# Allegro board DIAPAZON880.brd
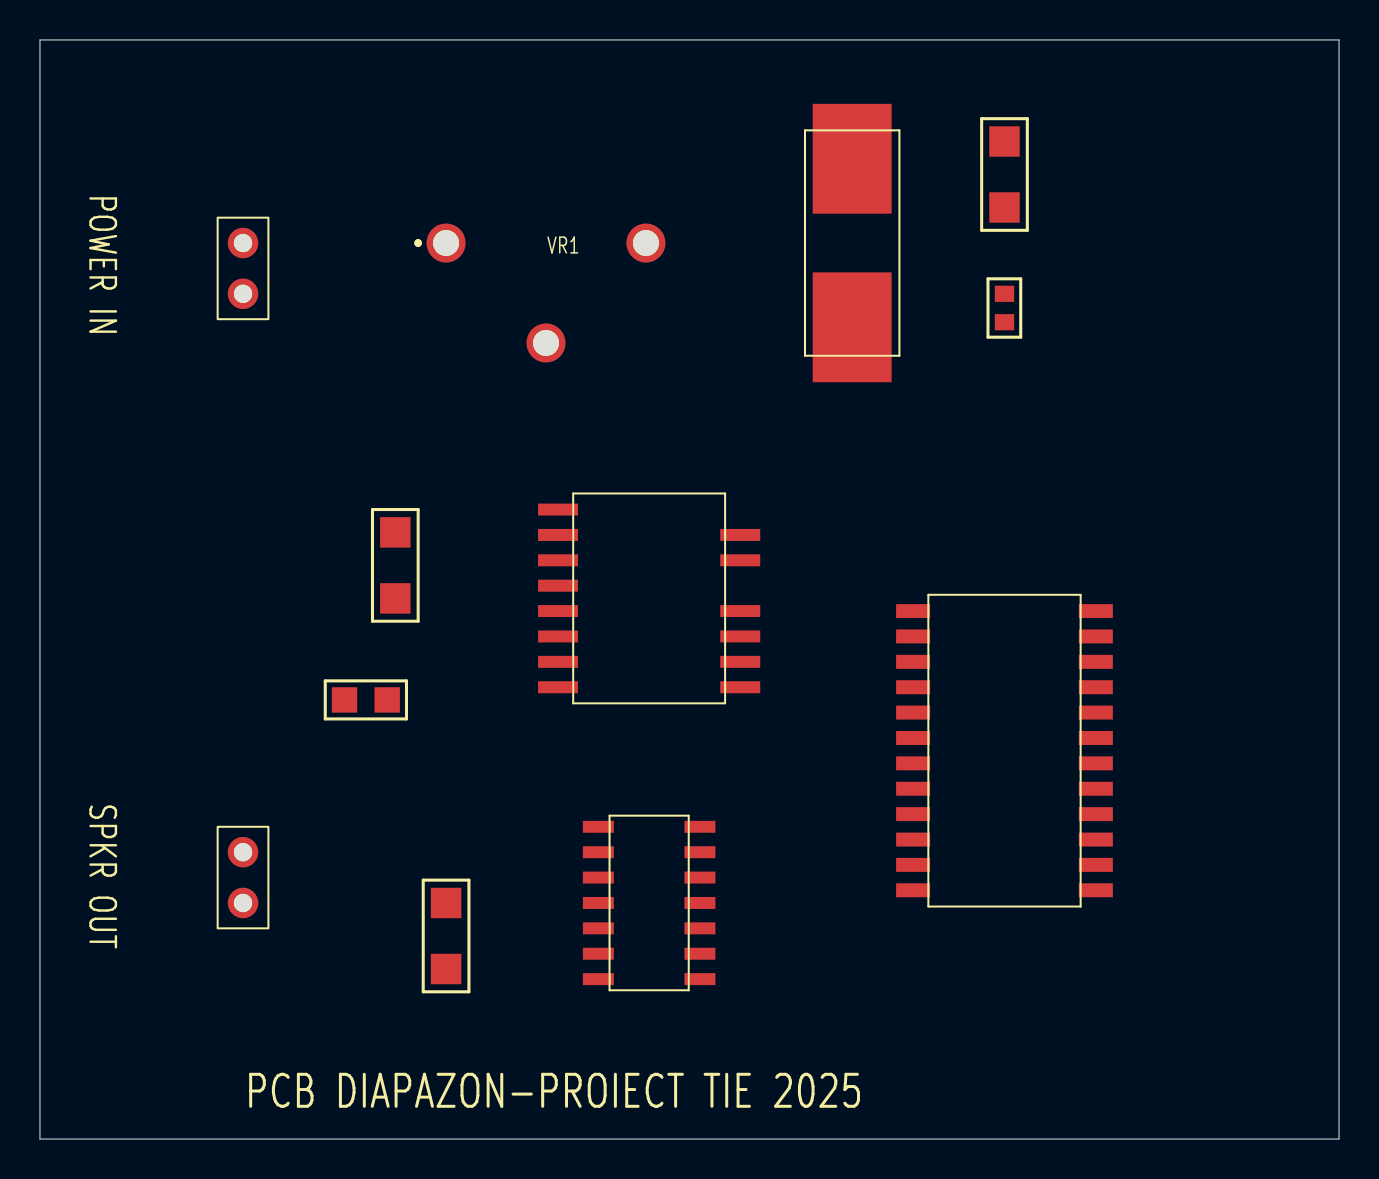
[diagram p0: board, top side]
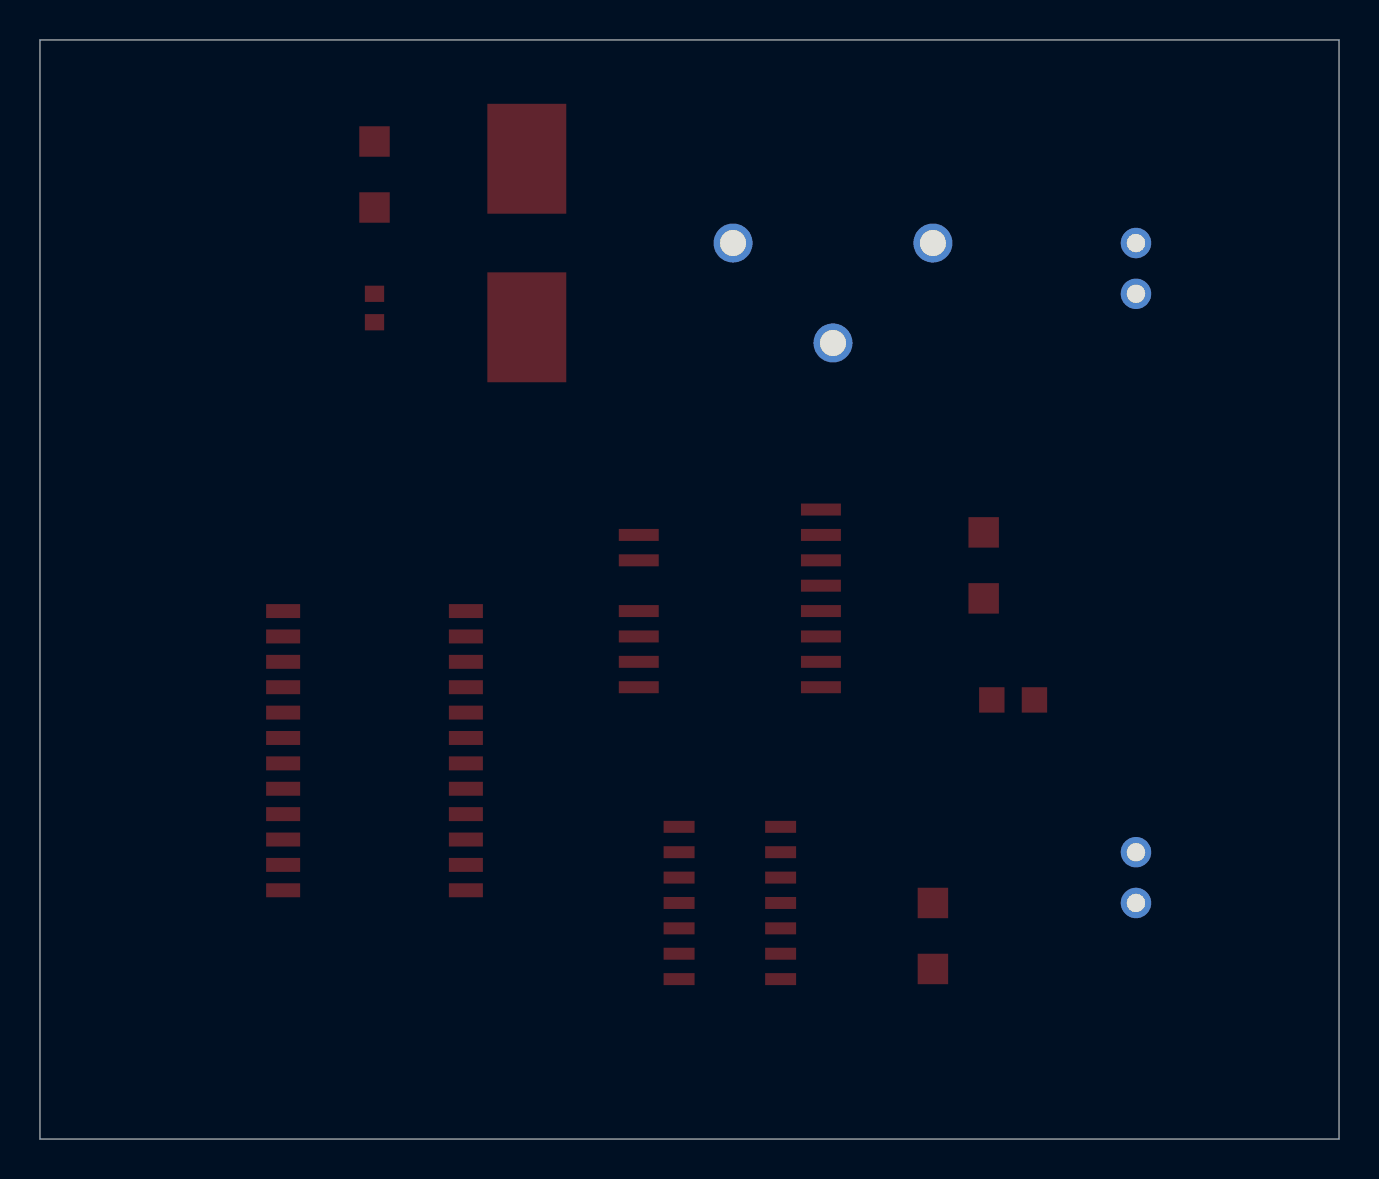
[diagram p1: board, bottom side, seen from below]

Outline 65 x 54.99 mm; copper layers: TOP, BOTTOM. Coordinates in mm from the lower left corner of the outline.
Outline path: 0,54.99 0,0 65,0 65,54.99 0,54.99

## Design rules (mm)
constraint set DEFAULT: min track width 0.127

## Placement (name value [footprint] x y rotation side)
C1  68p  [SMC0603]  48.26 42.29 270 top
C2  0.1  [SMC0805]  15.24 21.97 0 top
J1  CON2  [JUMPER2]  10.16 44.83 270 top
LS1  SPEAKER  [JUMPER2]  10.16 11.81 90 top
R1  1M  [SMC1206]  48.26 49.91 270 top
R2  1K  [SMC1206]  17.78 27.05 90 top
R3  1K  [SMC1206]  20.32 11.81 270 top
U1  4049  [CD4049]  30.48 27.05 0 top
U2  4013  [PTCD4013]  30.48 11.81 0 top
U3  4059  [CD74HC4059]  48.26 19.43 0 top
VR1  -  [BFC280831659]  20.32 44.83 0 top
Y1  3.2768M  [P2QUARTZ]  40.64 44.83 90 top

## Library data of the parts
C1 C2 = CAP
J1 = CON2: User Part Number: ***
LS1 = SPEAKER: User Part Number: ***
R1-R3 = RESISTOR
U1 = 4049_4
U2 = 4013_9
U3 = 4059_1
VR1 = BFC280831659
Y1 = CRYSTAL

## Footprints (pads in the part's own frame, mm; a bottom-side part is the same pattern mirrored in y, then rotated)
BFC280831659
  round 0 hole 3.2 unplated: (5,0)
  round 1.95 hole 1.3: 1(0,0) 2(5,-5) 3(10,0)
CD74HC4059
  rect 1.702x0.699 smd: 1(-4.572,6.985) 2(-4.572,5.715) 3(-4.572,4.445) 4(-4.572,3.175) 5(-4.572,1.905) 6(-4.572,0.635) 7(-4.572,-0.635) 8(-4.572,-1.905) 9(-4.572,-3.175) 10(-4.572,-4.445) 11(-4.572,-5.715) 12(-4.572,-6.985) 13(4.572,-6.985) 14(4.572,-5.715) 15(4.572,-4.445) 16(4.572,-3.175) 17(4.572,-1.905) 18(4.572,-0.635) 19(4.572,0.635) 20(4.572,1.905) 21(4.572,3.175) 22(4.572,4.445) 23(4.572,5.715) 24(4.572,6.985)
CD4049
  rect 1.999x0.599 smd: 1(-4.558,4.445) 2(-4.558,3.175) 3(-4.558,1.905) 4(-4.558,0.635) 5(-4.558,-0.635) 6(-4.558,-1.905) 7(-4.558,-3.175) 8(-4.558,-4.445) 9(4.558,-4.445) 10(4.558,-3.175) 11(4.558,-1.905) 12(4.558,-0.635) 14(4.558,1.905) 15(4.558,3.175)
JUMPER2
  round 1.524 hole 0.914: 1(0,0) 2(2.54,0)
P2QUARTZ
  rect 5.499x3.95 smd: 1(-4.216,0) 2(4.216,0)
PTCD4013
  rect 1.549x0.599 smd: 1(-2.54,3.81) 2(-2.54,2.54) 3(-2.54,1.27) 4(-2.54,0) 5(-2.54,-1.27) 6(-2.54,-2.54) 7(-2.54,-3.81) 8(2.54,-3.81) 9(2.54,-2.54) 10(2.54,-1.27) 11(2.54,0) 12(2.54,1.27) 13(2.54,2.54) 14(2.54,3.81)
SMC0603
  rect 0.813x0.965 smd: 1(0,0) 2(1.422,0)
SMC0805
  rect 1.27x1.27 smd: 1(0,0) 2(2.134,0)
SMC1206
  rect 1.524x1.524 smd: 1(0,0) 2(3.302,0)

## Nets
+9V: J1.2 U1.1 U2.14 U3.4 U3.10 U3.13 U3.14 U3.15 U3.20 U3.21 U3.24(VCC)
GND: C1.2 J1.1 U1.8 U2.4 U2.6 U2.7 U2.8(S) U2.10 U3.2 U3.3 U3.5 U3.6 U3.7 U3.8 U3.9 U3.11 U3.12 U3.16 U3.17 U3.18 U3.19 U3.22 VR1.2(S)
N00452: C1.1 R1.1 U1.3 Y1.2
N00494: R1.2 R2.2 VR1.1 VR1.3 Y1.1
N00555: R2.1 U1.2 U1.5
N01503: U2.1 U3.1
N02785: R3.2 U1.6 U1.9
N02849: C2.1 LS1.2 U1.10
N02853: C2.2 LS1.1 R3.1
N19077: U2.2 U2.5
N19833: U1.7 U2.13
N19841: U2.9 U2.12
N19859: U2.11 U3.23
N21382: U1.4 U2.3

Pads without a net: U1 11 12 14 15

## Text on the board
Ref Des/Silkscreen Top: POWER IN | SPKR OUT | PCB DIAPAZON-PROIECT TIE 2025
